# Altium PCB STM32.PcbDoc
Units mm, origin at the board's own origin, x right, y up, seen from the top; angles counter-clockwise.
Board outline 45 x 45 mm, 2 copper layers (Top Layer, Bottom Layer); 38 components, 26 nets, 184 pads, 77 vias.
Unrouted connection lines stored in the file: 3.
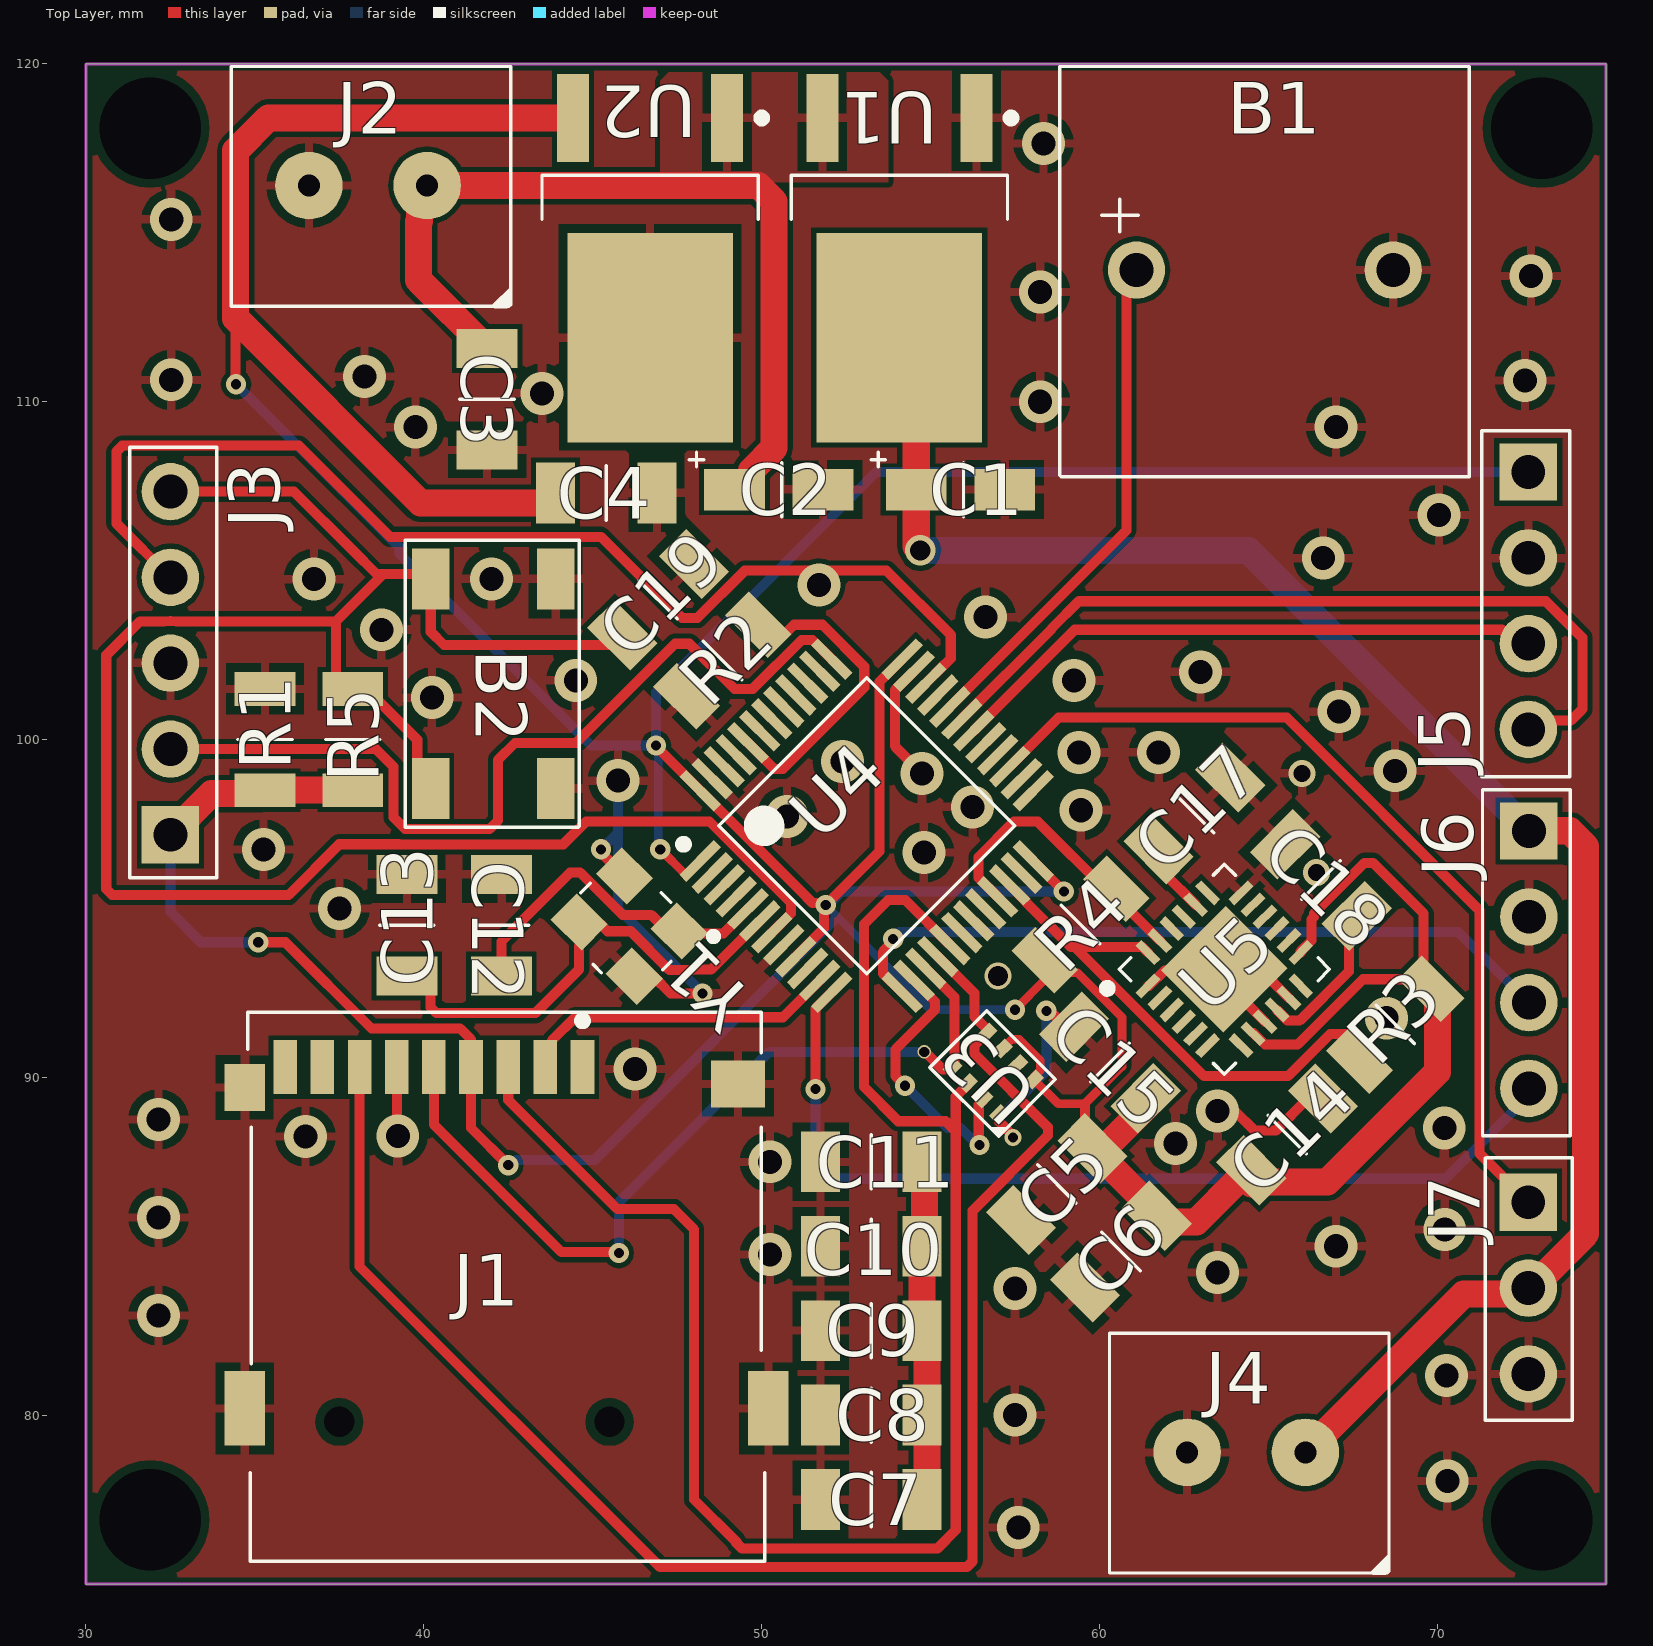
[diagram p0: Top Layer view]
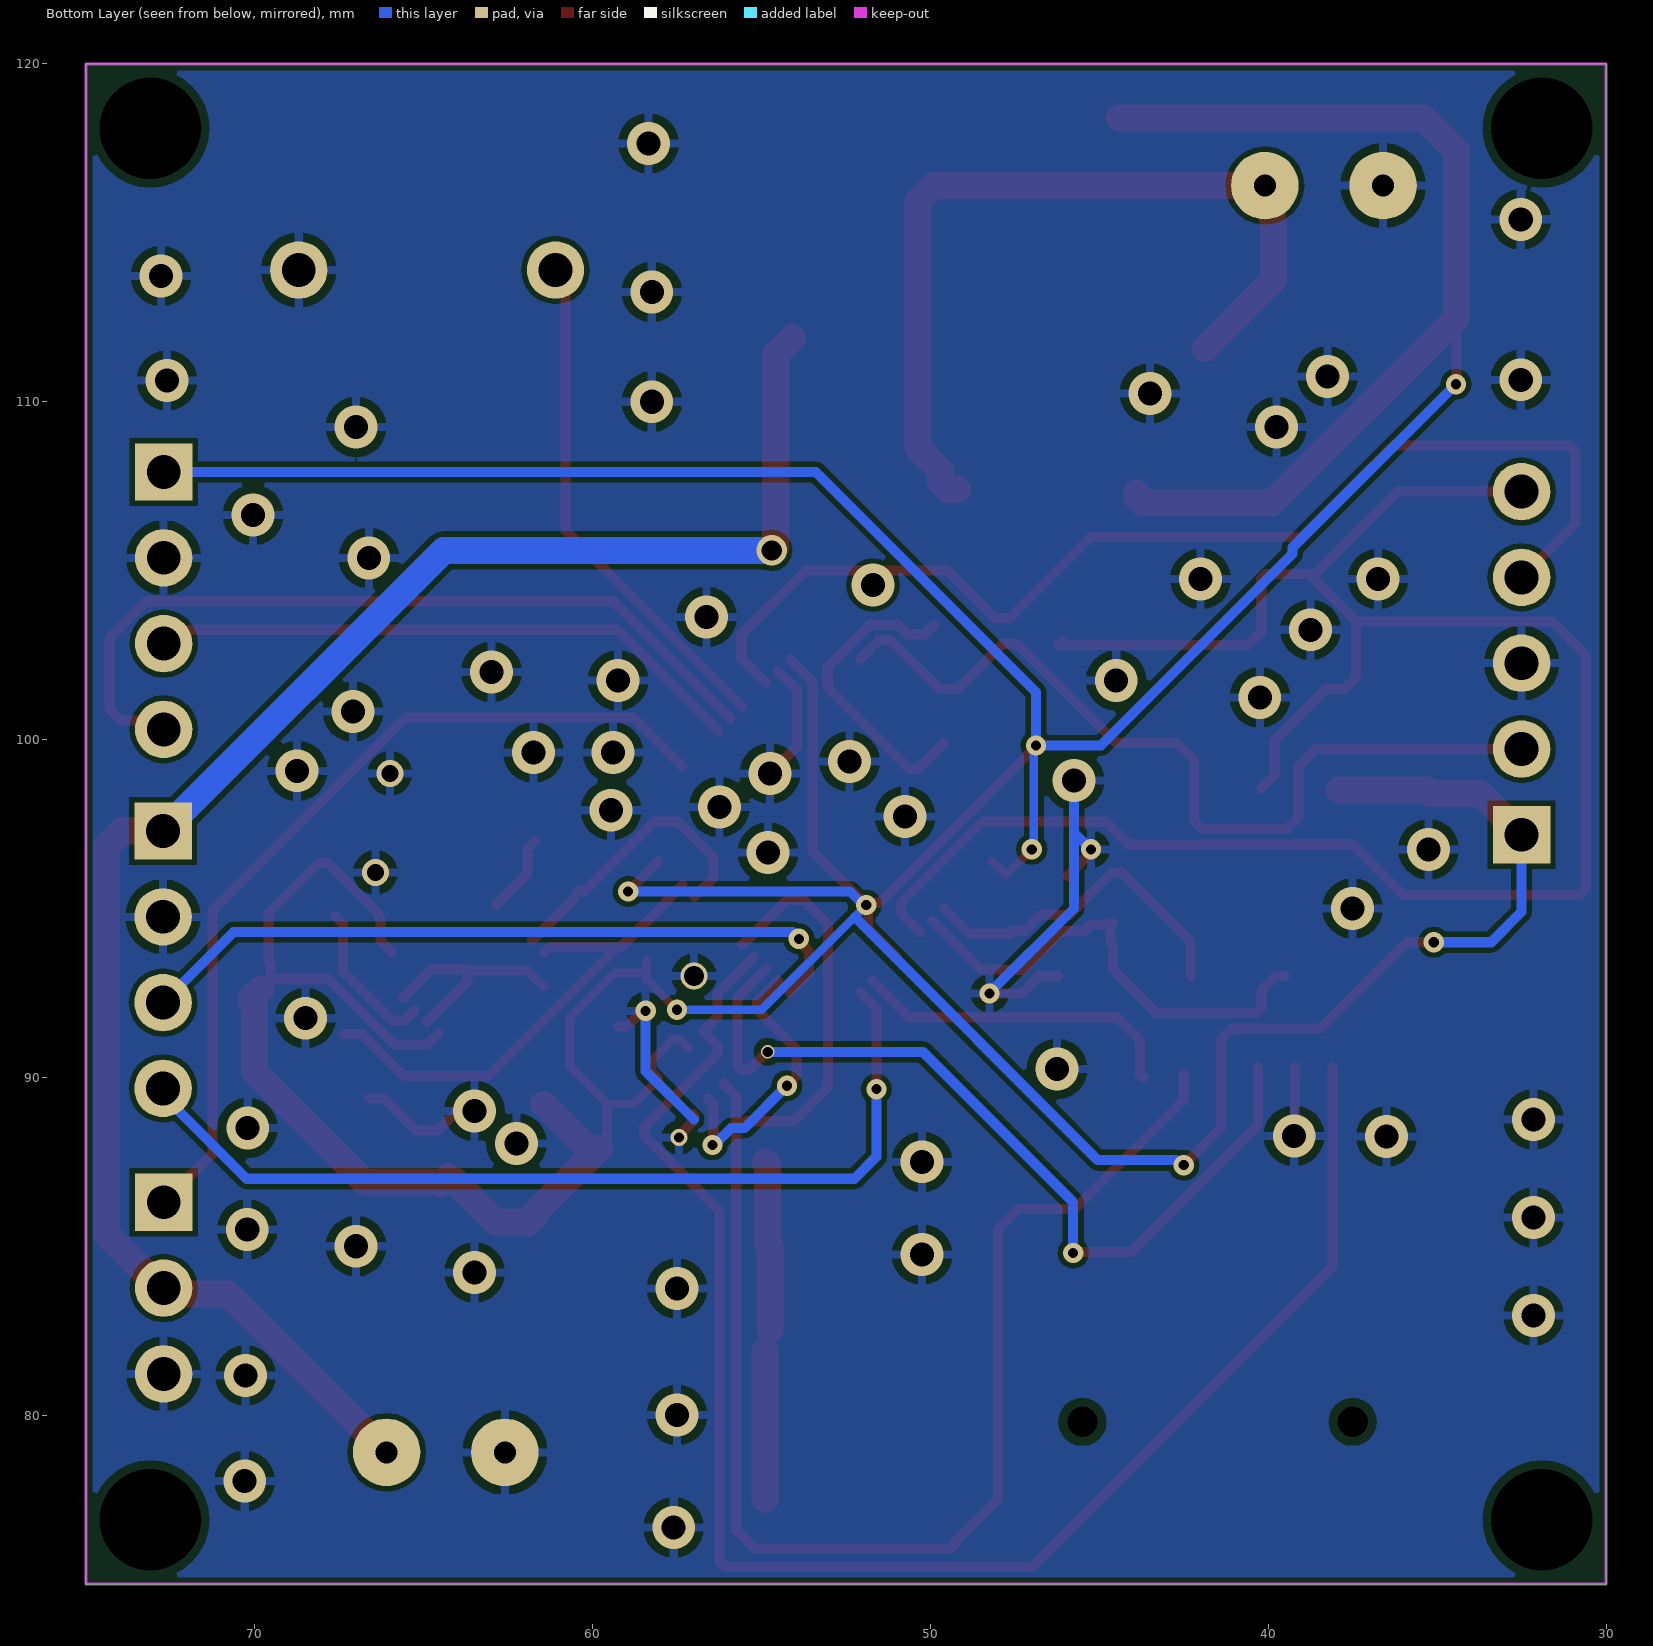
[diagram p1: Bottom Layer view, seen from below]
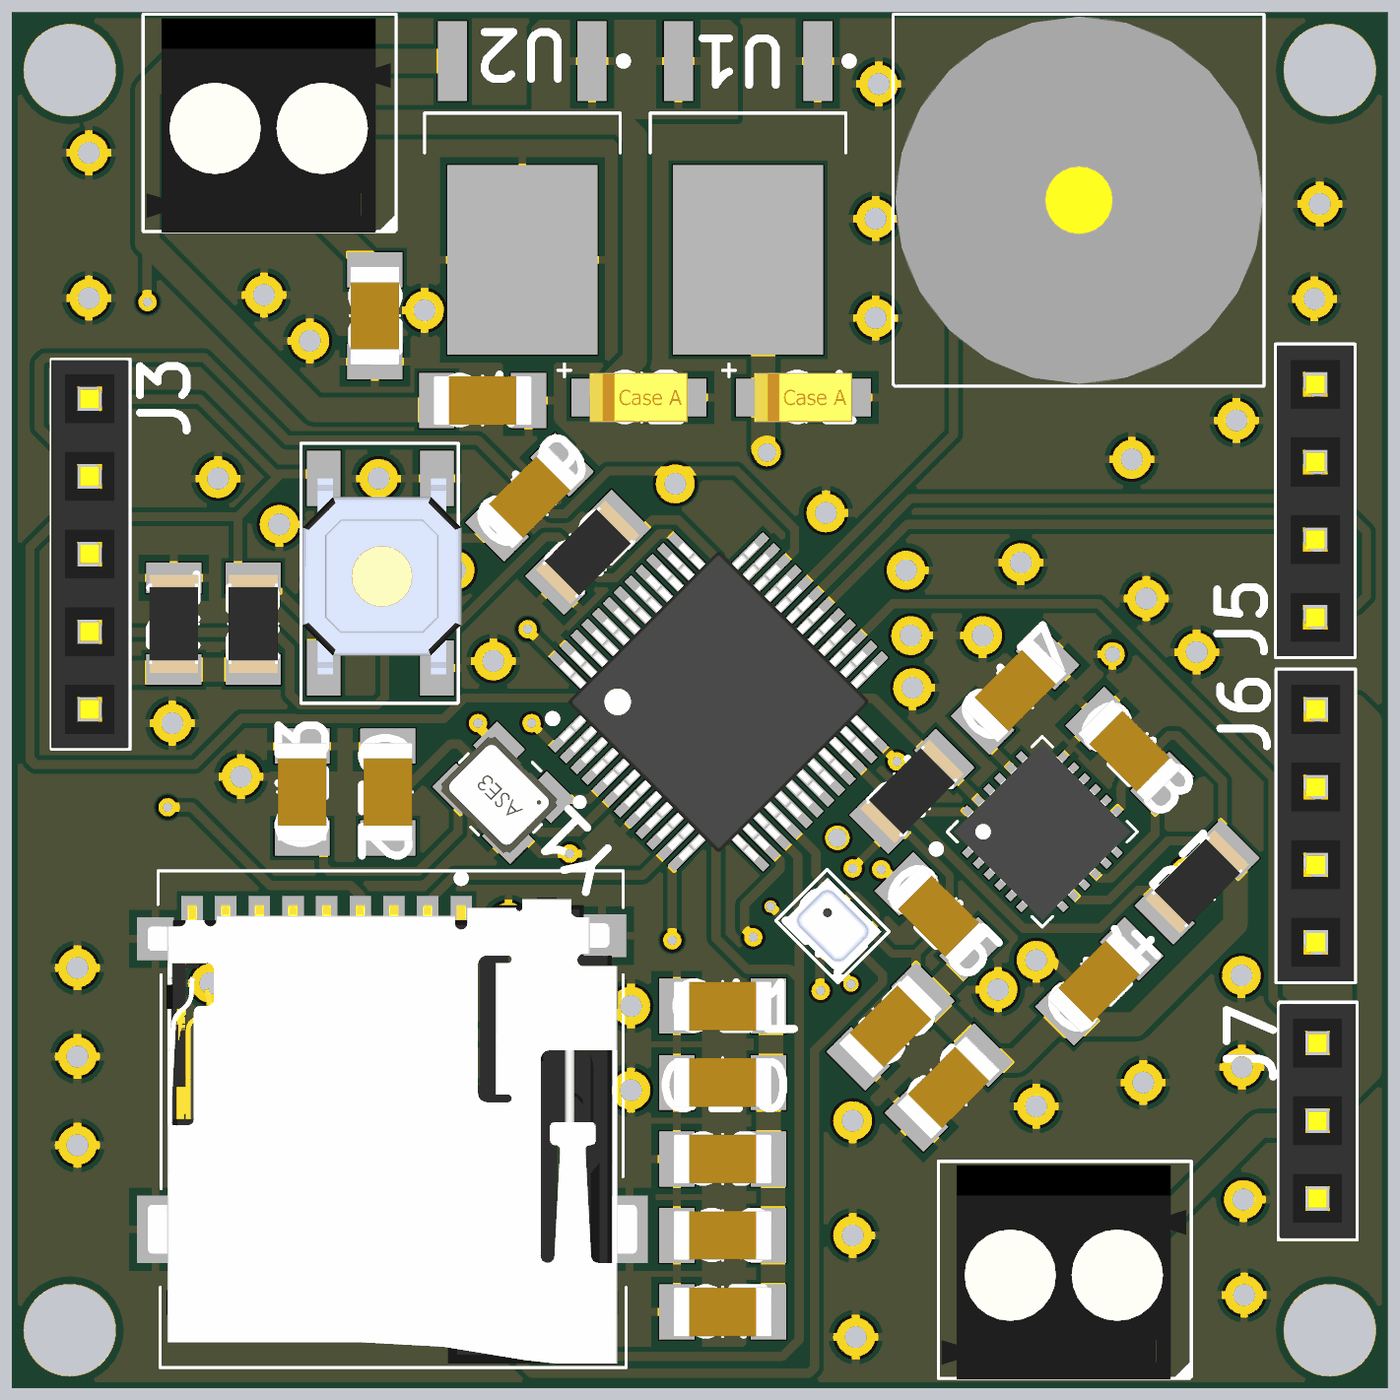
[diagram p2: 3D render of the assembled board from above, using the file's embedded part models]

## Layer stack, top to bottom
Top Solder: solder mask 0.0102, Solder Resist, Dk 3.5
Top Layer: signal copper 0.0356
Dielectric 1: dielectric 0.32, FR-4, Dk 4.8
Bottom Layer: signal copper 0.0356
Bottom Solder: solder mask 0.0102, Solder Resist, Dk 3.5

## Board outline
30,75 75,75 75,120 30,120

## Design rules (kind name [scope] priority, off if disabled: settings)
Clearance [All] p1: gap=0.254 ignorepadtopadclearanceinfootprint=FALSE except(0.152: Arc-Track Arc-SMDPad Arc-Poly Track-Track Track-SMDPad Track-Poly SMDPad-SMDPad SMDPad-THPad SMDPad-Poly THPad-Poly Via-Poly Fill-Poly Poly-Poly)
HoleSize [All] p1: absolutevalues=TRUE maxlimit=3.1 minlimit=0.025 maxpercent=80.000 minpercent=20.000
MinimumSolderMaskSliver [All] p1: minsoldermaskwidth=0.1
PolygonConnect [All] p1: connectstyle=Relief reliefconductorwidth=0.254 reliefentries=4 polygonreliefangle="90 Angle" airgapwidth=0.254
RoutingVias [All] p1: holewidth=0.3 width=0.6 viastyle="Through Hole" minholewidth=0.2 minwidth=0.2 maxholewidth=0.9 maxwidth=1.27
SilkToSolderMaskClearance [IsPad] p1: minsilkscreentomaskgap=0.1 clearancetoexposedcopper=TRUE
SolderMaskExpansion [All] p1: expansion=0.102 istentingtop=FALSE
Width [All] p1: maxlimit=1 minlimit=0.254 preferedwidth=0.3 minimp=50.000000 maximp=50.000000 favimp=50.000000
27 further rules are at their usual default settings.

## Classes and differential pairs
component class STM32: B1 B2 C1 C2 C3 C4 C5 C6 C7 C8 C9 C10 C11 C12 C13 C14 C15 C17 C18 C19 J2 J4 J5 J6 J7 R1 R2 R3 R4 R5 U1 U2 U3 U4 U5 Y1

## Components (designator, comment, footprint, x,y, rotation, side; value= is the part's Value field where it differs from the comment)
B1 "Buzzer 5v" "Buzzer 5v" 59.138,107.934 r0 top
B2 "Push Button" "PUSB BUTTON-SMD" 40.8,100.6 r90 top
C1 "10 uF - Tantal" "C1206- TANTAL" 53.337,106.443 r0 top
C2 "10 uF - Tantal" "C1206- TANTAL" 47.957,106.443 r0 top
C3 "330 nF C1206" C1206 42.715,108.019 r90 top
C4 "0.1 uF C1206" C1206 47.456,108.14 r180 top
C5 "0.1 uF C1206" C1206 57.879,84.792 r45 top
C6 "0.1 uF C1206" C1206 59.779,82.792 r45 top
C7 "0.1 uF C1206" C1206 51.194,76.66 r0 top
C8 "0.1 uF C1206" C1206 51.194,79.16 r0 top
C9 "0.1 uF C1206" C1206 51.194,81.66 r0 top
C10 "0.1 uF C1206" C1206 51.194,84.16 r0 top
C11 "0.1 uF C1206" C1206 51.194,86.66 r0 top
C12 "16 pF" C1206 43.14,92.444 r90 top
C13 "16 pF" C1206 40.34,92.444 r90 top
C14 "0.1 uF C1206" C1206 66.421,90.358 r225 top
C15 "0.1 uF C1206" C1206 58.263,91.299 r315 top
C17 "2.2 nF c1206" C1206 61.954,95.767 r45 top
C18 "0.1 uF C1206" C1206 64.513,96.699 r315 top
C19 "0.1 uF C1206" C1206 47.799,106.187 r225 top
J1 "Micro SD Card Holder" "Micro SD Card Holder" 41.851,84.434 r0 top
J2 "Klemens 1x2 3.5mm" "Klemens 1x2 - 3.5mm" 43.027,120.252 r180 top
J3 "Header 2.54 1x5" "Header 2.54 1x5" 33.926,95.994 r90 top
J4 "Klemens 1x2 3.5mm" "Klemens 1x2 - 3.5mm" 69.027,82.752 r180 top
J5 "Header 2.54 1x4" "Header 2.54 1x4" 71.482,109.028 r270 top
J6 "Header 2.54 1x4" "Header 2.54 1x4" 71.5,98.4 r270 top
J7 "Header 2.54 1x3" "Header 2.54 1x3" 71.499,87.554 r270 top
R1 "10K R1206" "R1206 Resıstor" 34.172,102.264 r270 top
R2 "10K R1206" "R1206 Resıstor" 49.643,104.738 r225 top
R3 "4.7K R1206" "R1206 Resıstor" 67.957,89.162 r45 top
R4 "4.7K R1206" "R1206 Resıstor" 60.244,96.922 r225 top
R5 "10K R1206" "R1206 Resıstor" 36.772,102.264 r270 top
U1 "LD108633 DPAK" DPAK228P972X230-3N 50.863,119.764 r270 top
U2 "L7805-DPAK" DPAK228P972X230-3N 43.483,119.764 r270 top
U3 "BMP280" BMP280 58.636,89.954 r135 top
U4 "STM32F101" LQFP48-STM 53,97.5 r45 top
U5 "MPU6050" QFN50P400X400X90_HS-25N 63.648,93.228 r45 top
Y1 "8 MHz 12.5 pf Osc" "8 MHZ Osc." 48.639,94.212 r135 top

## Footprints (in the part's own frame and the unit in brackets; to place one, negate y for a bottom-side part, rotate by r counter-clockwise, add the part's x,y. Pads: shape width x height; smd on the part's side, far side on the other; paste and mask are expansions set on the pad)
"8 MHZ Osc." [mm]
  rect 1.3x1.1 smd mask+0.05: 1(0.846,0.674) 2(3.146,0.674) 3(3.13,2.581) 4(0.841,2.565)
  silkscreen extent -0.09,-0.02 3.71,3.17, body extent 0.45,0.52 3.65,3.02, height 1.22
BMP280 [mm]
  rect 0.35x0.5 smd mask+0.05: 1(0.398,1.867) 2(1.048,1.867) 3(1.698,1.867) 4(2.348,1.867) 5(2.348,0.417) 6(1.698,0.417) 7(1.048,0.417) 8(0.398,0.417)
  silkscreen extent -0.08,-0.03 2.82,2.34, body extent 0.13,0.14 2.63,2.14, height 0.95
"Buzzer 5v" [mm]
  round 1.7 hole 1 mask+0.05: 1(1.962,5.966) 2(9.562,5.966)
  silkscreen extent -0.31,-0.16 11.81,11.99, body extent -0.24,-0.08 11.76,11.92, height 9.5
C1206 [mm]
  rect 1.15x1.8 smd mask+0.05: 1(0.556,0.84) 2(3.556,0.84)
  silkscreen extent 2.06,0.04 2.06,1.65, body extent 0.46,0.04 3.66,1.64, height 1
"C1206- TANTAL" [mm]
  rect 1.8x1.23 smd mask+0.05: 1(1.243,0.957) 1(1.243,0.957) 2(3.863,0.957)
  silkscreen extent -0.09,0.16 2.64,2.06, body extent 0.94,0.16 4.14,1.76, height 1.62
DPAK228P972X230-3N [mm]
  rect 2.6x0.95 smd mask+0.05: 1(1.364,5.497) 2(1.364,0.937)
  rect 6.2x4.9 smd mask+0.05: 3(7.864,3.217)
  silkscreen extent 1.24,0.02 4.36,6.65, body extent 3.01,0.02 9.61,6.42, height 2.3
"Header 2.54 1x3" [mm]
  rect 1.7x1.7 hole 1 mask+0.05: 1(1.254,1.201)
  round 1.7 hole 1 mask+0.05: 2(3.794,1.201) 3(6.334,1.201)
  silkscreen extent -0.07,-0.07 7.7,2.5, body extent -0.01,-0.05 7.61,2.45, height 9.1
"Header 2.54 1x4" [mm]
  rect 1.7x1.7 hole 1 mask+0.05: 1(1.108,1.218)
  round 1.7 hole 1 mask+0.05: 2(3.648,1.218) 3(6.188,1.218) 4(8.728,1.218)
  silkscreen extent -0.12,-0.16 10.13,2.44, body extent -0.07,-0.11 10.09,2.39, height 9.1
"Header 2.54 1x5" [mm]
  rect 1.7x1.7 hole 1 mask+0.05: 1(1.186,1.426)
  round 1.7 hole 1 mask+0.05: 2(3.726,1.426) 3(6.266,1.426) 4(8.806,1.426) 5(11.346,1.426)
  silkscreen extent -0.09,0.05 12.66,2.63, body extent -0.06,0.13 12.64,2.63, height 9.1
"Klemens 1x2 - 3.5mm" [mm]
  round 2 hole 0.65: 1(2.927,3.852) 2(6.427,3.852)
  silkscreen extent 0.42,0.33 8.73,7.48, body extent 0.63,0.45 8.62,7.45, height 8.9
LQFP48-STM [mm]
  rect 1.45x0.3 smd mask+0.05: 1(-4.18,2.63) 2(-4.18,2.13) 3(-4.18,1.63) 4(-4.18,1.13) 5(-4.18,0.63) 6(-4.18,0.13) 7(-4.18,-0.37) 8(-4.18,-0.87) 9(-4.18,-1.37) 10(-4.18,-1.87) 11(-4.18,-2.37) 12(-4.18,-2.87) 25(4.27,-2.87) 26(4.27,-2.37) 27(4.27,-1.87) 28(4.27,-1.37) 29(4.27,-0.87) 30(4.27,-0.37) 31(4.27,0.13) 32(4.27,0.63) 33(4.27,1.13) 34(4.27,1.63) 35(4.27,2.13) 36(4.27,2.63)
  rect 0.3x1.45 smd mask+0.05: 13(-2.705,-4.345) 14(-2.205,-4.345) 15(-1.705,-4.345) 16(-1.205,-4.345) 17(-0.705,-4.345) 18(-0.205,-4.345) 19(0.295,-4.345) 20(0.795,-4.345) 21(1.295,-4.345) 22(1.795,-4.345) 23(2.295,-4.345) 24(2.795,-4.345) 37(2.795,4.105) 38(2.295,4.105) 39(1.795,4.105) 40(1.295,4.105) 41(0.795,4.105) 42(0.295,4.105) 43(-0.205,4.105) 44(-0.705,4.105) 45(-1.205,4.105) 46(-1.705,4.105) 47(-2.205,4.105) 48(-2.705,4.105)
  silkscreen extent -4.3,-3.22 3.15,3.45, body extent -4.46,-4.62 4.55,4.38, height 1.6
"Micro SD Card Holder" [mm]
  rect 0.7x1.6 smd paste+0 mask+0: 1(2.849,5.866) 2(1.749,5.866) 3(0.649,5.866) 4(-0.451,5.866) 5(-1.551,5.866) 6(-2.651,5.866) 7(-3.751,5.866) 8(-4.851,5.866) Cd(-5.951,5.866)
  rect 1.2x1.4 smd paste+0 mask+0: 10(-7.151,5.266)
  rect 1.6x1.4 smd paste+0 mask+0: 11(7.449,5.366)
  rect 1.2x2.2 smd paste+0 mask+0: 12(-7.151,-4.234) 13(8.349,-4.234)
  round 0 hole 0.9 unplated paste-1000 mask+0: ""(-4.351,-4.634) ""(3.649,-4.634)
  silkscreen extent -7.06,-8.76 8.24,7.49, body extent -7.4,-8.63 8.6,6.62, height 1.85
"PUSB BUTTON-SMD" [mm]
  rect 1.8x1.1 smd mask+0.05: 1(-2.048,0.593) 2(4.152,0.593) 3(-2.048,-3.107) 4(4.152,-3.107)
  silkscreen extent -3.2,-3.81 5.3,1.34, body extent -2.25,-3.91 4.15,1.29, height 1.5
QFN50P400X400X90_HS-25N [mm]
  rect 0.8x0.25 smd mask+0.05: 1(-1.933,1.194) 2(-1.933,0.694) 3(-1.933,0.194) 4(-1.933,-0.306) 5(-1.933,-0.806) 6(-1.933,-1.306) 13(1.967,-1.306) 14(1.967,-0.806) 15(1.967,-0.306) 16(1.967,0.194) 17(1.967,0.694) 18(1.967,1.194)
  rect 0.25x0.8 smd mask+0.05: 7(-1.233,-2.006) 8(-0.733,-2.006) 9(-0.233,-2.006) 10(0.267,-2.006) 11(0.767,-2.006) 12(1.267,-2.006) 19(1.267,1.894) 20(0.767,1.894) 21(0.267,1.894) 22(-0.233,1.894) 23(-0.733,1.894) 24(-1.233,1.894)
  rect 2.7x2.6 smd mask+0.05: 25(0.017,-0.056)
  silkscreen extent -2.96,-2.26 2.22,2.14, body extent -2.05,-2.13 2.09,2.01, height 0.9
"R1206 Resıstor" [mm]
  rect 1x1.8 smd mask+0.05: 1(0.764,1.128) 2(3.764,1.128)
  silkscreen extent 2.26,0.32 2.26,1.93, body extent 0.66,0.32 3.86,1.93, height 0.55

## Part data
B2: "Smd Push Button"
U1: "LD1086 3.3V REGULATOR"
U2: "L7805 5V REGULATOR. SMD PAKET"
U4: "STM32F101 48 PİNLİ MİKROİŞLEMCİ"
U5: "MPU6050 GYRO"

## Free pads (board coordinates)
  rect 0x0 hole 3: 14(31.9,76.9) 14(31.9,118.1) 14(73.1,76.9) 14(73.1,118.1)

## Via types
v1: diameter 1.27, hole 0.711, Top Layer to Bottom Layer, 55 vias
v2: diameter 0.6, hole 0.3, Top Layer to Bottom Layer, 16 vias
v3: diameter 0.8, hole 0.5, Top Layer to Bottom Layer, 2 vias
v4: diameter 0.5, hole 0.3, Top Layer to Bottom Layer, 1 vias
v5: diameter 0.8, hole 0.6, Top Layer to Bottom Layer, 1 vias
v6: diameter 0.4, hole 0.3, Top Layer to Bottom Layer, 1 vias
v7: diameter 0.9, hole 0.6, Top Layer to Bottom Layer, 1 vias

## Nets (pads, with @x,y where several pads share a name; then routed paths per layer and width w, separated by ;. In a path a pad name is that pad's centre, name@x,y a point inside that pad or via, vN(x,y) a via of type N, cw(c..) or ccw(c..) an arc to the next point about the centre after c; other vN are vias at no path point)
3.3V: C4.2 C5.2 C6.2 C14.2 C15.2 J1.4 J3.1 J5.1 R1.2 R3.2 R4.2 R5.2 U2.2 U3.6 U3.8 U4.1 U4.9 U4.24 U4.36 U4.48 U5.8 U5.13 | length 193.9
  Top Layer w0.254: v2(47,96.75) 47.749,96.001 47.782,96.001 U4.1 ; U3.6 57.403,91.122 57.628,91.122 58.25,90.5 58.25,90.199 58.06,90.008 U3.8 58.781,89.219 59.57,89.219 60.67,90.319 60.67,91.779 59.353,93.096 R4.2@58.612,93.096 ; v2(57.5,92) 58.408,92.908 58.408,93.435 R4.2
  Top Layer w0.3: 34.431,112.469 34.431,110.531 v2(34.443,110.519) ; v2(35.1,94) 35.9,94 38.452,91.448 41.076,91.448 41.4,91.124 J1.4 41.4,88.5 v2(42.5,87.4) ; v2(46.875,99.825) 46.875,99.8 U4.48 48.898,97.777 48.904,97.777 51.325,95.355 51.325,95.349 51.517,95.157 51.843,95.157 v2@51.844,95.156 ; U4.9 51.844,94.406 v2@51.844,95.156 ; U4.36 53.494,101.713 53.494,96.694 v2(51.9,95.1) v2@51.844,95.156 ; U4.24 58.95,95.503 v2(58.95,95.5) ; 59.57,89.219 59.57,88.13 C5.2 ; U5.8@64.566,91.308 64.83,91.045 64.904,90.971 65.871,90.971 67.804,92.904 69.488,92.904 R3.2@69.538,92.954 ; U5.13 65.963,93.73 66.282,94.05 66.282,94.368 66.276,94.374 66.276,94.674 66.356,94.753 66.356,94.856 67.851,96.351 68.099,96.351 69.217,95.233 69.6,94.85 69.6,93.461 69.538,93.399 R3.2@69.538,92.954 ; R3.2 69.538,92.904 R3.2@69.538,92.954
  Top Layer w0.8: J3.1 33.72,98.4 35.2,98.4 R1.2 R5.2 ; C4.2 43.9,107.175 43.725,107 39.9,107 34.431,112.469 34.431,117.431 35.4,118.4 U2.2 ; C15.2@61.453,89.2 60.1,87.847 C5.2 61.7,86 C6.2 61.93,85.67 62.227,85.72 62.87,85.72 64.13,86.98 64.18,86.98 64.279,87.079 C14.2@64.508,86.849 ; C14.2@64.806,86.899 66.749,86.899 70.013,90.163 70.013,92.106 70.104,92.197 70.104,92.338 R3.2
  Bottom Layer w0.254: v2(46.875,99.825) 46.938,99.762 46.938,96.812 v2(47,96.75) ; v2(51.9,95.1) 52.25,94.75 55,92 v2(57.5,92)
  Bottom Layer w0.3: J3.1 32.5,94.9 33.4,94 v2(35.1,94) ; v2(34.443,110.519) 39.285,105.677 39.285,105.496 44.956,99.825 v2(46.875,99.825) 46.875,101.4 53.395,107.92 J5.1 ; v2(42.5,87.4) 42.581,87.4 42.731,87.55 45.05,87.55 52.22,94.72 ; v2(51.9,95.1) 51.981,95.1 52.381,95.5 v2(58.95,95.5)
5V: C1.1 J4.1 J6.1 J7.2 U1.3 | length 52.3
  Top Layer w0.8: U1.3 54.58,111.4 54.58,107.4 54.58,105.72 v7(54.7,105.6) ; J4.1 70.788,83.588 72.528,83.588 J7.2 72.785,83.76 74.398,85.373 74.398,96.831 73.929,97.3 72.726,97.3 J6.1
  Bottom Layer w0.8: v7(54.7,105.6) 64.41,105.6 J6.1
7.4V: C2.1 C3.2 J2.1 U1.2 U2.1 | length 25.4
  Top Layer w0.8: C3.2 39.85,113.6 39.85,115.331 39.87,115.352 39.87,116.17 J2.1 49.906,116.4 50.375,115.931 50.375,108.639 49.7,107.964 49.7,107.615 49.485,107.4 C2.1@49.2,107.4
GND: B1.2 B2.3 B2.4 C1.2 C2.2 C3.1 C4.1 C5.1 C6.1 C7.1 C8.1 C9.1 C10.1 C11.1 C12.2 C13.2 C14.1 C15.1 C17.2 C18.1 C19.1 J1.6 J1.10 J1.11 J1.12 J1.13 J2.2 J3.3 J4.2 J5.2 J6.2 J7.3 R1.1 R2.2 U1.1 U2.3 U3.1 U3.7 U4.8 U4.23 U4.35 U4.47 U5.1 U5.9 U5.11 U5.18 U5.25 Y1.2 Y1.4 | length 33.3
  Top Layer w0.3: J1.6 39.2,90 39.212,89.987 39.212,88.287 v1(39.231,88.269) ; v2(45.25,96.75) 45.25,96.647 Y1.2 ; Y1.4 46.796,92.993 47.304,92.485 v2(48.25,92.485) ; U4.35 53.946,101.458 53.946,99.804 v1(54.75,99) ; U3.1 56.981,88.862 56.981,88.827 57.034,88.774 57.034,88.684 57.446,88.272 v4(57.446,88.218) ; v2(58.432,91.969) 58.531,91.969 59,91.5 C15.1 ; U5.1 61.473,92.705 61.932,93.165 63.665,93.165 U5.25 ; v1(63.5,89) 64.018,89 64.597,88.421 65.221,88.421 66.171,89.371 C14.1 ; U5.9 63.7,92.846 U5.25 ; U5.11 64.761,93.2 U5.25
  Bottom Layer w0.3: v2(45.25,96.75) 45.75,97.25 ; v1(45.75,98.786) 45.75,97.25 ; v2(48.25,92.485) 48.25,92.5 45.75,95 45.75,97.25 ; 57,88.75 58.432,90.182 v2(58.432,91.969)
  other v1: 57.6,76.675 70.3,78.05 57.5,80 70.275,81.175 32.15,82.95 57.5,83.75 63.5,84.225 50.25,84.75 67,85 70.225,85.5 32.15,85.85 50.25,87.5 62.25,88.039 36.5,88.25 70.211,88.5 32.15,88.75 46.25,90.25 68.5,91.75 37.5,95 54.81,96.651 35.25,96.75 50.75,97.725 59.459,97.907 56.25,98 68.75,99.075 52.4,99.35 59.398,99.613 61.75,99.613 67.1,100.825 40.25,101.25 44.5,101.75 59.25,101.75 63,102 38.75,103.25 56.627,103.627 36.75,104.75 42,104.75 66.627,105.377 70.05,106.65 39.75,109.25 67,109.25 58.25,110 43.5,110.25 72.6,110.625 32.525,110.65 38.25,110.75 58.25,113.25 72.775,113.725 32.525,115.4 58.35,117.65
  other v3: 66.431,96.069 66,99
  other v5: 57,93
NetB1_1: B1.1 U4.32 | length 15.1
  Top Layer w0.3: U4.32 60.8,106.191 B1.1@60.8,113.9
NetC12_1: C12.1 U4.5 Y1.1 | length 10.2
  Top Layer w0.3: C12.1 42.3,94.025 44.338,96.063 44.63,96.063 45.883,94.809 46.733,94.809 47.208,94.333 Y1.1 47.635,94.262 48.871,94.262 U4.5
NetC13_1: C13.1 U4.6 Y1.3 | length 14.3
  Top Layer w0.3: C13.1 39.775,93 40.2,92.575 40.2,92.076 40.376,91.9 43.3,91.9 44.6,93.2 44.6,93.893 44.671,93.964 Y1.3@44.671,94.529 ; Y1.3 Y1.3@44.671,94.529 ; U4.6 48.505,93.189 47.958,93.189 47.949,93.18 47.271,93.18 46.126,94.325 45.441,94.325 45.236,94.529 Y1.3@44.671,94.529
NetC17_1: C17.1 U5.20 | length 2.4
  Top Layer w0.3: C17.1@61.7,97 61.93,96.77 61.93,96.031 U5.20
NetC18_2: C18.2 U5.10 | length 4.6
  Top Layer w0.3: U5.10 65.575,91.678 65.929,91.678 67.392,93.141 67.392,94.549 C18.2
NetJ1_2: J1.2 U4.11 | length 9.8
  Top Layer w0.3: J1.2@43.7,90 43.793,90.093 43.793,91.093 44.481,91.781 50.633,91.781 U4.11
NetJ1_3: J1.3 U3.3 U4.17 | length 49.3
  Top Layer w0.3: J1.3@42.5,90.1 42.5,89.332 45.732,86.1 47.4,86.1 48,85.5 48,77.5 49.25,76.25 49.25,76.224 49.426,76.048 55.2,76.048 55.75,76.598 55.75,88.402 ; U4.17 54.253,95.25 53.75,95.25 53.031,94.531 53.031,89.719 54.048,88.702 55.45,88.702 55.75,88.402 ; U3.3 56.115,89.799 55.75,89.434 55.75,88.402
NetJ1_5: J1.5 U3.4 U4.15 | length 25.5
  Top Layer w0.3: J1.5 40.3,88.604 44.079,84.825 45.675,84.825 45.7,84.8 v2(45.775,84.8) ; v6(54.817,90.755) 54.839,90.755 55.353,90.241 55.602,90.241 55.708,90.347 55.708,92.38 U4.15
  Bottom Layer w0.3: v2(45.775,84.8) 45.775,86.3 50.23,90.755 v6(54.817,90.755)
NetJ1_7: J1.7 U3.5 U4.16 | length 48.3
  Top Layer w0.3: J1.7 38.1,84.4 47,75.5 56.074,75.5 56.25,75.676 56.25,86.05 58.476,88.276 58.476,88.524 56.305,90.695 56.305,90.944 U3.5 ; U4.16 56.3,92.496 56.3,91.8 56.713,91.387 U3.5@56.713,91.352
NetJ3_2: J3.2 U4.37 | length 26.1
  Top Layer w0.3: J3.2 38.58,99.72 39.1,99.2 39.1,99.127 39.102,99.125 39.102,97.698 39.45,97.35 41.95,97.35 42.2,97.6 42.2,99.4 42.7,99.9 44.5,99.9 47.438,102.838 47.862,102.838 49.2,101.5 49.742,101.5 51.188,102.946 51.507,102.946 U4.37
NetJ3_4: J3.4 U4.34 | length 34.4
  Top Layer w0.3: J3.4 30.9,106.4 30.9,108.524 31.076,108.7 36.3,108.7 39,106 45.246,106 47.649,103.597 48.097,103.597 49.5,105 53.7,105 55.6,103.1 55.6,102.4 55.4,102.2 55.395,102.2 U4.34
  other v1: 51.7,104.575
NetJ5_3: J5.3 U4.30 | length 17.8
  Top Layer w0.3: U4.30 59.273,103.25 71.911,103.25 72.321,102.84 J5.3
NetJ5_4: J5.4 U4.31 | length 24.2
  Top Layer w0.3: U4.31 58.6,103.284 58.6,103.3 59.394,104.094 73.219,104.094 74.3,103.013 74.3,100.9 73.968,100.568 72.968,100.568 J5.4
NetJ6_3: J6.3 U4.13 | length 21.7
  Top Layer w0.3: v2(53.896,94.1) 53.896,94.019 53.592,93.716 53.592,93.082 U4.13
  Bottom Layer w0.3: v2(53.896,94.1) 53.896,94.124 54.071,94.3 70.63,94.3 J6.3
NetJ6_4: J6.4 U4.12 | length 27.7
  Top Layer w0.3: v2(51.6,89.65) 51.6,92.041 U4.12
  Bottom Layer w0.3: v2(51.6,89.65) 51.6,87.65 52.25,87 70.25,87 72.718,89.468 J6.4
NetJ7_1: J7.1 U4.27 | length 26.1
  Top Layer w0.3: U4.27 58.797,100.652 65.548,100.652 71.25,94.95 71.25,87.75 J7.1
NetR2_1: R2.1 U4.44 | length 9.3
  Top Layer w0.3: U4.44 50.377,99.126 50.626,99.126 53.042,101.542 53.042,102.158 51.802,103.398 50.959,103.398 50.678,103.117 50.183,103.117 R2.1
NetR3_1: R3.1 U4.22 U5.24 | length 15.1
  Top Layer w0.3: U4.22 57.81,95.228 57.81,95.208 59.164,93.854 61.278,93.854 U5.24 ; 59.28,93.854 63.095,90.039 65.589,90.039 66.829,91.279 R3.1@67.379,91.279
NetR4_1: R4.1 U4.21 U5.23 | length 8.5
  Top Layer w0.3: U4.21 56.421,95.91 56.421,96.521 57.469,97.569 58.181,97.569 60.25,95.5 R4.1@60.45,95.5 ; R4.1@60.539,95.3 U5.23
NetU3_2: U3.2 U4.14 | length 8.4
  Top Layer w0.3: v2(54.25,89.75) 53.965,90.035 53.965,90.829 55.135,91.998 55.135,92.247 U4.14 ; v2(56.454,88) 56.432,88.022 56.432,89.196 56.575,89.339 U3.2
  Bottom Layer w0.3: v2(54.25,89.75) 55.5,88.5 55.9,88.5 56.4,88 v2(56.454,88)
NRST: B2.1 B2.2 C19.2 J3.5 R5.1 U4.7 | length 62.6
  Top Layer w0.3: J3.5 36.16,107.34 37.9,105.6 38.6,104.9 38.8,104.9 ; B2.1 39.807,98.952 39.807,99.993 38.3,101.5 R5.1 37.75,101.5 37.4,101.85 37.4,103.5 ; C19.2@46.1,102.9 46.2,102.8 40.6,102.8 40.207,103.193 B2.2 40.059,104.9 38.8,104.9 ; U4.7 50.873,94.85 50.873,95.168 48.716,97.325 48.711,97.325 48.46,97.575 44.807,97.575 44.13,96.898 39.263,96.898 39.261,96.9 37.5,96.9 36,95.4 30.776,95.4 30.6,95.576 30.6,102.5 31.6,103.5 32.313,103.5 cw(c32.5,102.26) 32.687,103.5 37.4,103.5 ; 37.4,103.5 37.9,104 38.7,104.8 38.8,104.9
VCC: C7.2 C8.2 C9.2 C10.2 C11.2 | length 9.5
  Top Layer w0.8: C9.2 C10.2 54.825,85.075 54.825,87.425 C11.2@54.9,87.5 ; C7.2@54.9,77.5 C9.2@54.9,81.9
pads on no net: J1. J1.1 J1.8 J1.Cd U4.2 U4.3 U4.4 U4.10 U4.18 U4.19 U4.20 U4.25 U4.26 U4.28 U4.29 U4.33 U4.38 U4.39 U4.40 U4.41 U4.42 U4.43 U4.45 U4.46 U5.2 U5.3 U5.4 U5.5 U5.6 U5.7 U5.12 U5.14 U5.15 U5.16 U5.17 U5.19 U5.21 U5.22

## Polygon pours and split planes (outlines as drawn)
GND on Top Layer "GND_L01_P018" (solid, pour order 18): 30,120 75,120 75,75 30,75
7.4V on Top Layer "7.4V_L01_P017" (solid, pour order 17): 47,116.5 47,119.5 47.25,119.75 53.5,119.75 53.75,119.5 53.75,116.5
GND on Bottom Layer "GND_L02_P019" (solid, pour order 19): 30,120 75,120 75,75 30,75

## Keep-outs
Keep-Out Layer:
  the board outline again, w0.1